# Altium PCB Merilnik_2016_12_20.PcbDoc
Units mm, origin at the board's own origin, x right, y up, seen from the top; angles counter-clockwise.
Board outline 76.75 x 74.18 mm, 2 copper layers (Top Layer, Bottom Layer); 56 components, 46 nets, 217 pads, 29 vias.
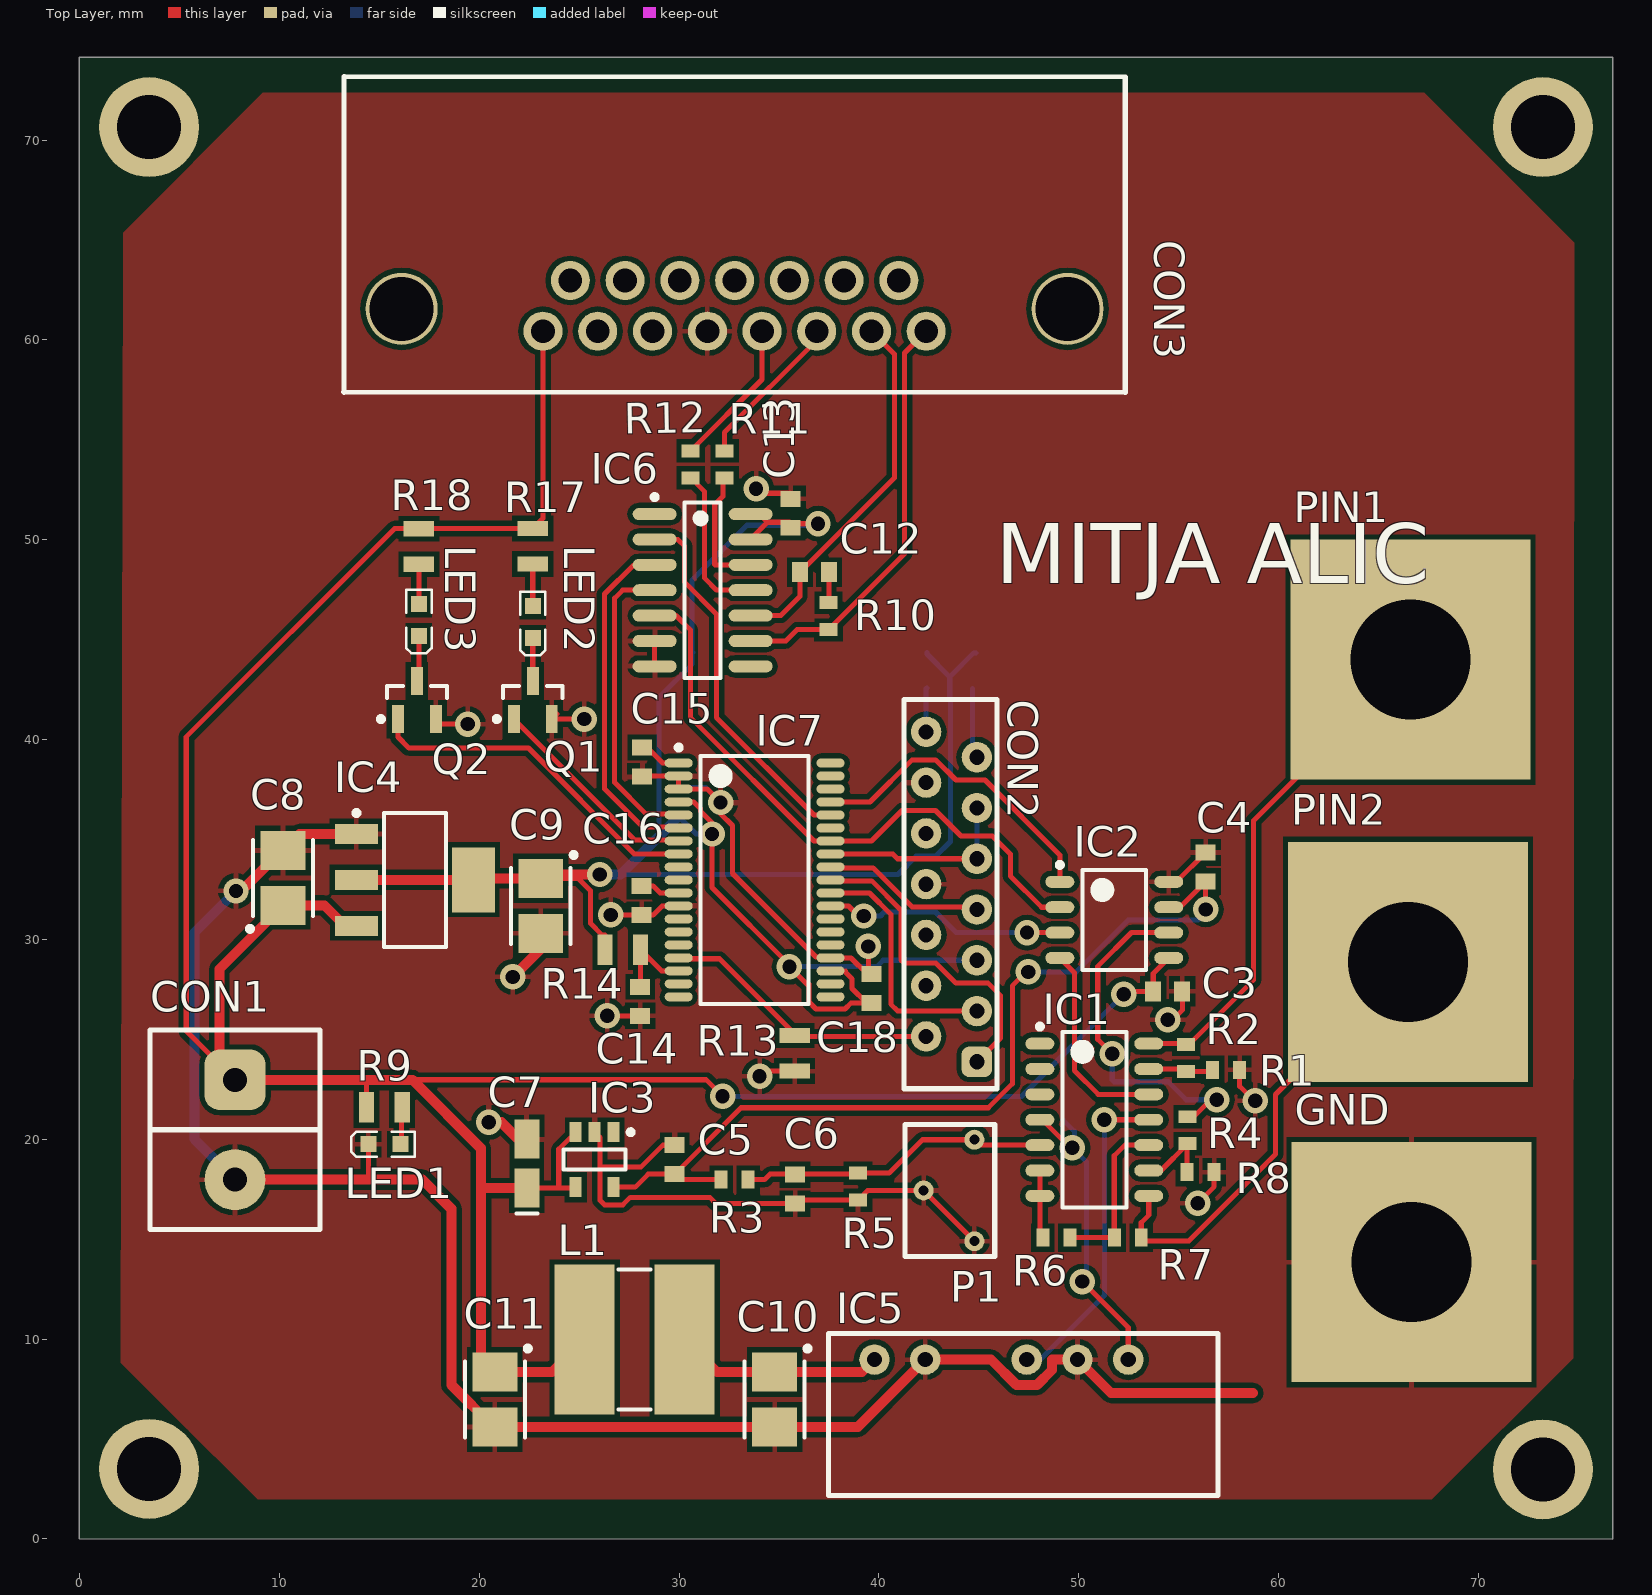
[diagram p0: Top Layer view]
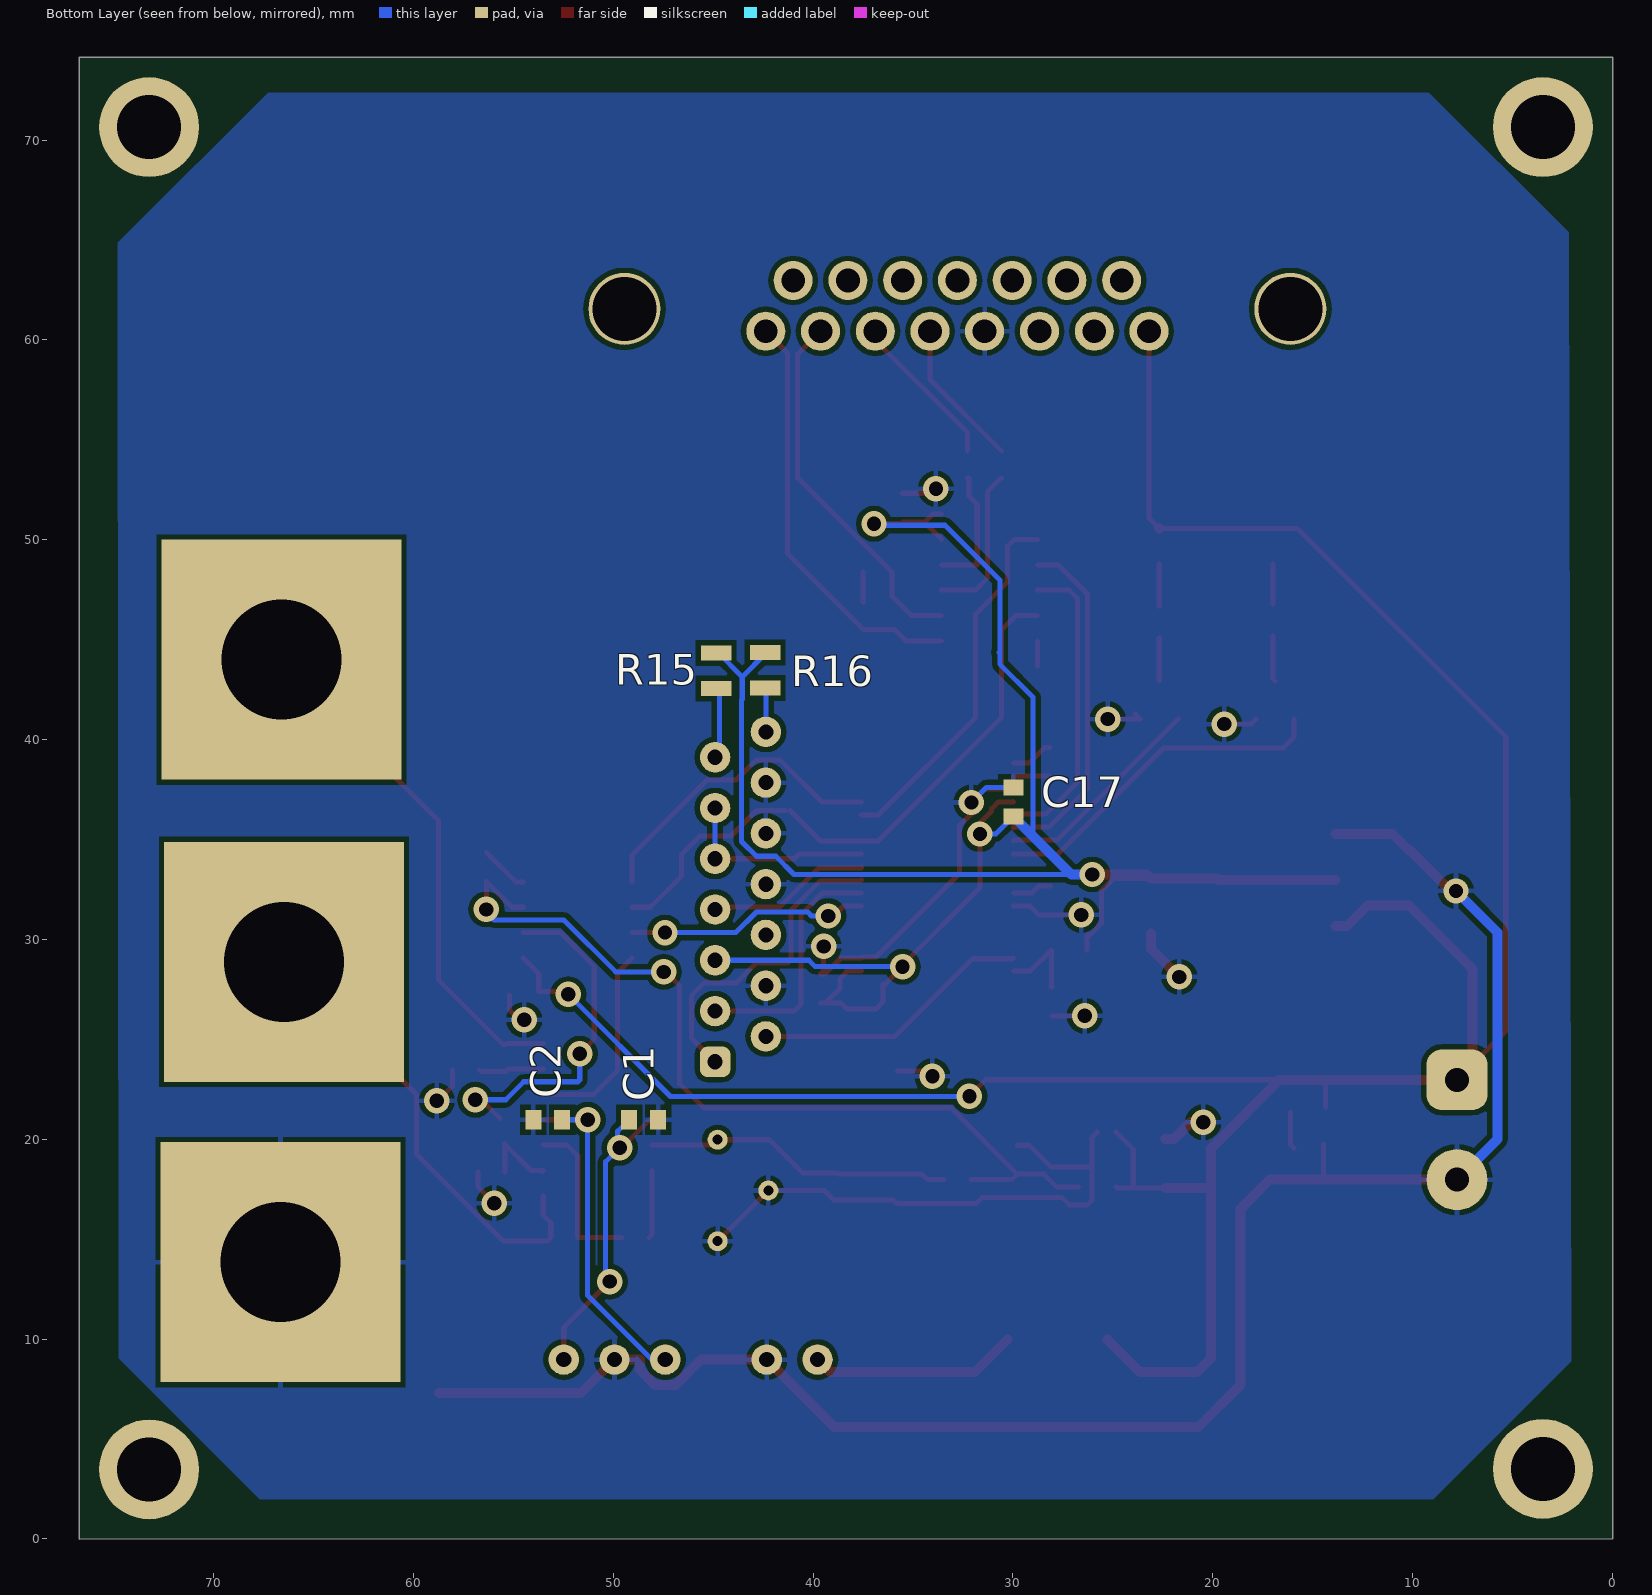
[diagram p1: Bottom Layer view, seen from below]
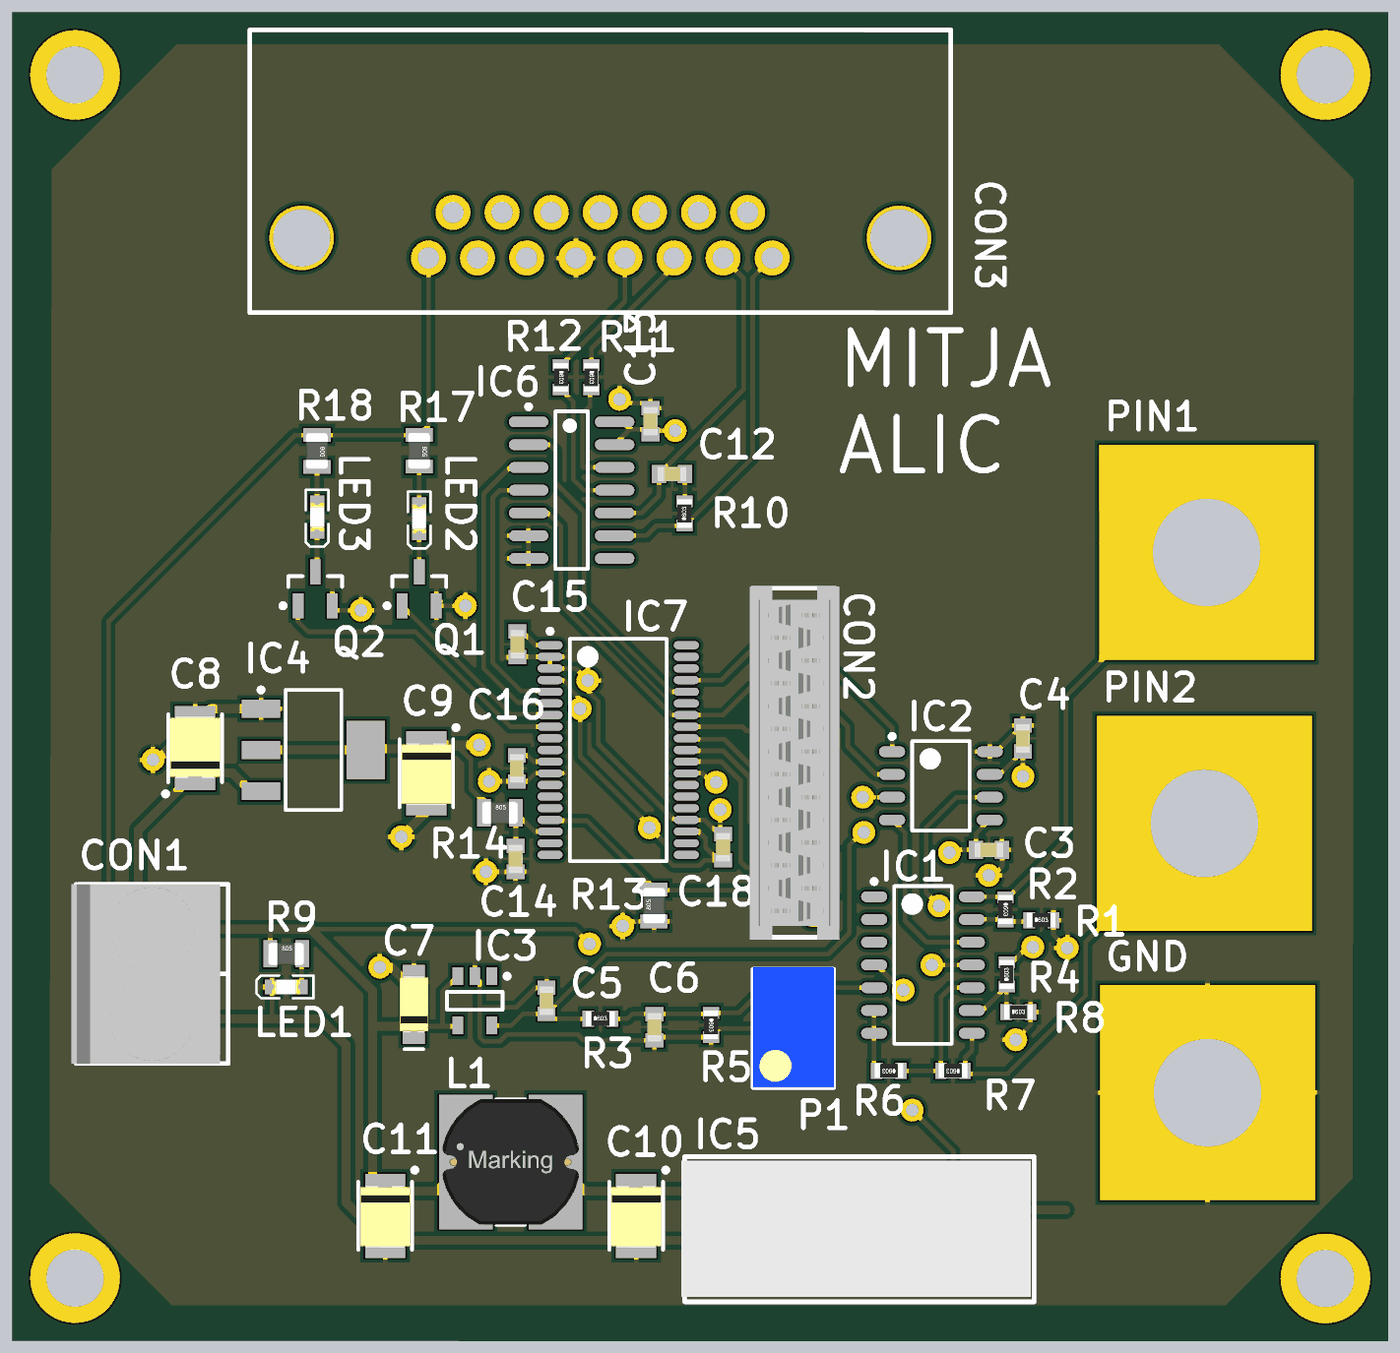
[diagram p2: 3D render of the assembled board from above, using the file's embedded part models]
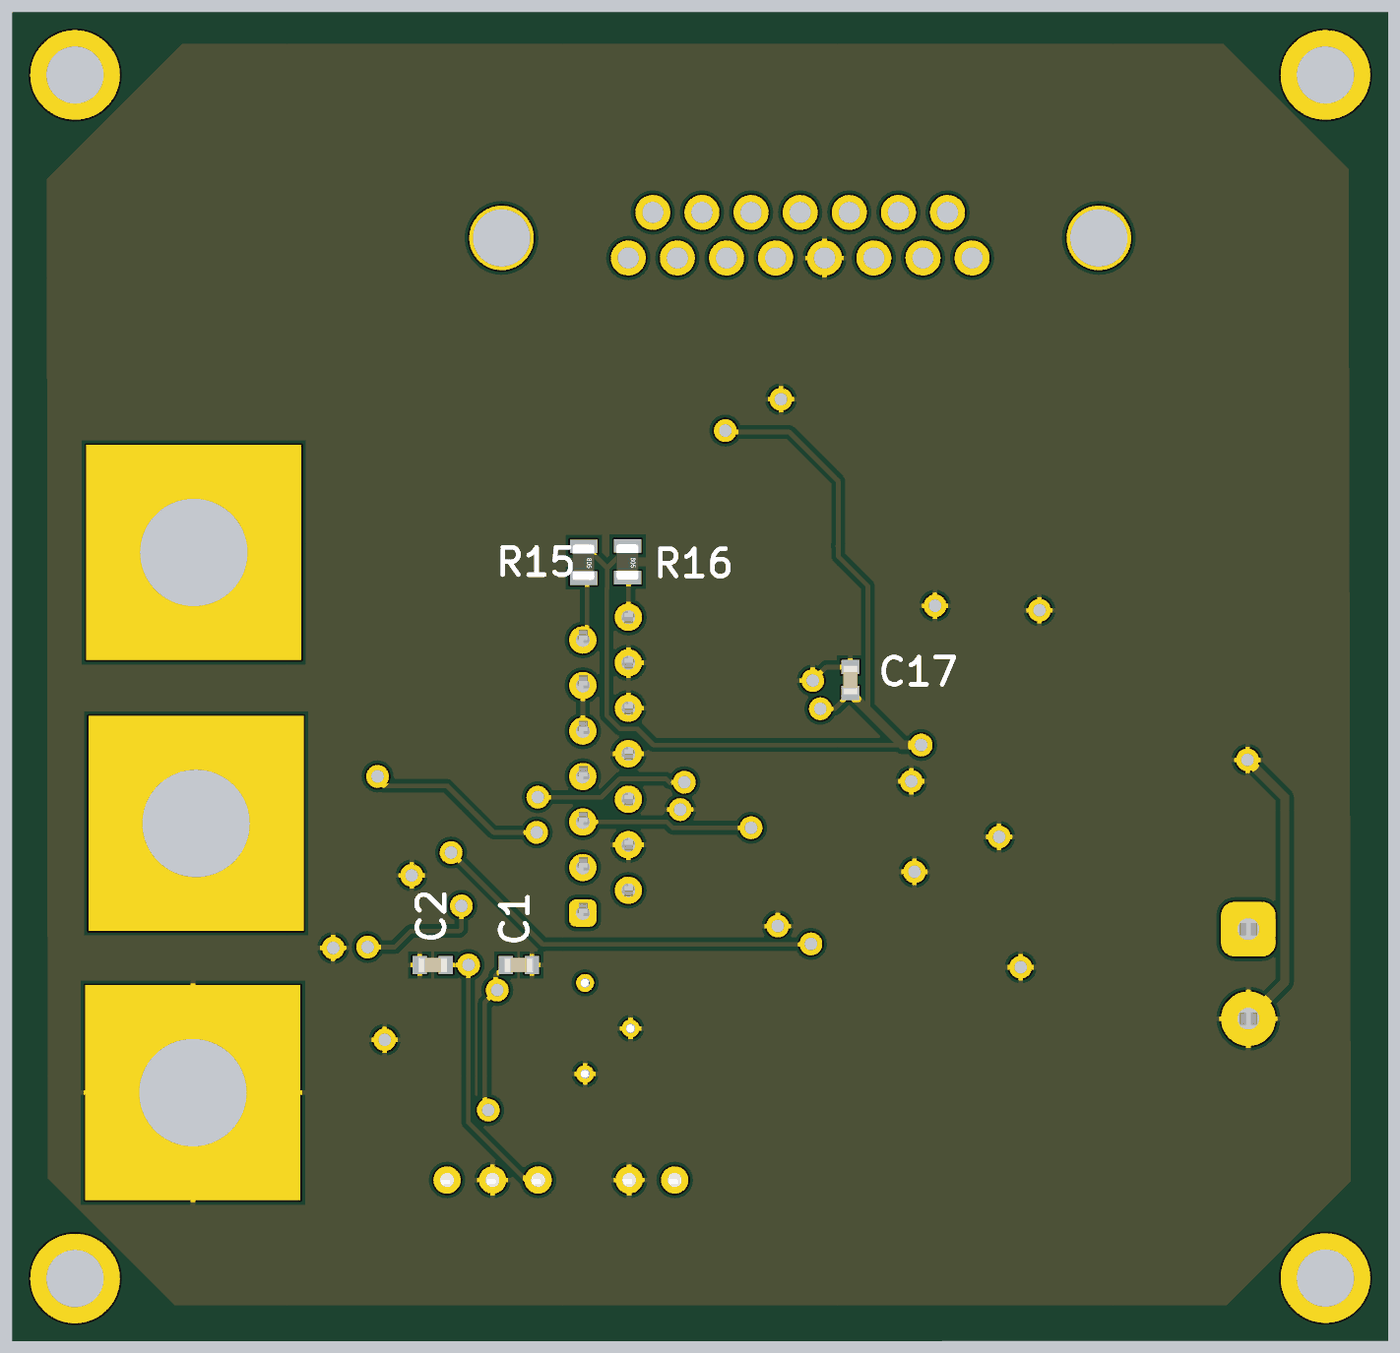
[diagram p3: 3D render of the assembled board from below, using the file's embedded part models]

## Layer stack, top to bottom
Top Solder: solder mask 0.0102, Solder Resist, Dk 3.5
Top Layer: signal copper 0.0356
Dielectric 1: dielectric 0.32, FR-4, Dk 4.8
Bottom Layer: signal copper 0.0356
Bottom Solder: solder mask 0.0102, Solder Resist, Dk 3.5

## Board outline
-0.025,0 76.725,-0.025 76.725,74.15 -0.025,74.15

## Design rules (kind name [scope] priority, off if disabled: settings)
Clearance [All] p1: gap=0.254
PolygonConnect [InNet('GND') vs InNet('GND')] p1: connectstyle=Relief reliefconductorwidth=0.254 reliefentries=4 polygonreliefangle="90 Angle" airgapwidth=0.254
RoutingVias [All] p1: holewidth=0.711 width=1.27 viastyle="Through Hole" minholewidth=0.711 minwidth=1.27 maxholewidth=0.711 maxwidth=1.27
SolderMaskExpansion [All] p1: expansion=0.102
Width [All] p1: maxlimit=0.5 minlimit=0.254 preferedwidth=0.254 minimp=50.000000 maximp=50.000000 favimp=50.000000
30 further rules are at their usual default settings.

## Classes and differential pairs
component class Sheet1: C12 C13 C14 C15 C16 C17 C18 CON2 CON3 IC6 IC7 LED2 LED3 Q1 Q2 R10 R11 R12 R13 R14 R15 R16 R17 R18
component class Designator: C7 C8 C9 C10 C11 CON1 IC3 IC4 IC5 L1 LED1 R9

## Components (designator, comment, footprint, x,y, rotation, side; value= is the part's Value field where it differs from the comment)
C1 "100n" C0603 48.475,20.975 r180 bottom
C2 "100n" C0603 53.275,20.975 r0 bottom
C3 "100n" C0603 54.45,27.4 r0 top
C4 "100n" C0603 56.35,33.625 r90 top
C5 "100n" C0603 29.775,18.975 r90 top
C6 "10p" C0603 35.8,17.5 r270 top
C7 "4u7" "C Tantal A" 22.375,18.775 r90 top
C8 "10u" "C Tantal B" 10.175,33.075 r90 top
C9 "10u" "C Tantal B" 23.075,31.675 r270 top
C10 "2.2u" "C Tantal B" 34.775,6.975 r270 top
C11 "2.2u" "C Tantal B" 20.775,6.975 r270 top
C12 "150p" C0603 36.775,48.375 r180 top
C13 "100n" C0603 35.575,51.325 r90 top
C14 "100n" C0603 28.05,26.9 r270 top
C15 "2u2" C0603 28.15,38.875 r270 top
C16 "2u2" C0603 28.125,31.95 r270 top
C17 "100n" C0603 29.975,36.875 r90 bottom
C18 "2u2" C0603 39.625,27.55 r90 top
CON1 "CON_2pin_5mm" CON_2pin_5mm 7.775,22.975 r270 top
CON2 "JTAG" "JTAG micromatch" 44.9,23.875 r270 top
CON3 "DSUbConector" "DSUB conector" 42.365,60.435 r0 top
GND "PUSA" PUSA 66.65,13.85 r0 top
IC1 "OPA4192IPW onepack" OPA4192 50.775,20.975 r0 top
IC2 "TLV5618ACD" TLV5618ACD 51.775,30.975 r0 top
IC3 "LM4132BMF-4.1" SOT95P280X145-5N 25.775,18.975 r270 top
IC4 "LM1117" SOT230P700X180-4N 16.775,32.975 r0 top
IC5 "TMA 0515D" "TMA 0515D" 39.775,8.975 r270 top
IC6 "SN65HVD73D" D14_N 31.175,47.475 r0 top
IC7 "TMS320F28027_DA_" TSOP65P810X120-38N 33.775,32.975 r0 top
L1 "WE-PD2, 74477530" WE-PD2_7850 27.775,9.975 r0 top
LED1 "150060YS75000" LED_0603_Yellow 15.25,19.75 r180 top
LED2 "150060RS75000" LED_0603_Red 22.675,45.875 r270 top
LED3 "150060VS75000" "LED_0603_Bright Green" 16.975,45.975 r270 top
P1 "200k" Bourns_3266W 44.775,20.735 r270 top
PIN1 "PUSA" PUSA 66.6,44 r0 top
PIN2 "PUSA" PUSA 66.475,28.875 r0 top
Q1 "BSN20,215" NXP-SOT23_N 22.675,41.975 r90 top
Q2 "BSN20,215" NXP-SOT23_N 16.875,41.975 r90 top
R1 "110k" R0603 57.375,23.475 r0 top
R2 "158k" R0603 55.375,24.075 r270 top
R3 "10k" R0603 32.775,17.975 r0 top
R4 "1k" R0603 55.45,20.45 r90 top
R5 "11k" R0603 38.95,17.625 r270 top
R6 "1k" R0603 48.875,15.075 r180 top
R7 "4.87k" R0603 52.45,15.075 r180 top
R8 "4.87k" R0603 56.1,18.35 r0 top
R9 "120" R0805 15.25,21.6 r0 top
R10 "120" R0603 37.475,46.175 r90 top
R11 "10" R0603 32.275,53.775 r270 top
R12 "10" R0603 30.575,53.775 r270 top
R13 "120" R0805 35.775,24.3 r90 top
R14 "120" R0805 27.175,29.475 r0 top
R15 "" R0805 44.85,43.45 r270 bottom
R16 "" R0805 42.4,43.475 r270 bottom
R17 "120" R0805 22.675,49.675 r270 top
R18 "120" R0805 16.975,49.664 r270 top

## Footprints (in the part's own frame and the unit in brackets; to place one, negate y for a bottom-side part, rotate by r counter-clockwise, add the part's x,y. Pads: shape width x height; smd on the part's side, far side on the other; paste and mask are expansions set on the pad)
Bourns_3266W [mm]
  round 1 hole 0.5: 1(0.76,0) 2(3.3,-2.54) 3(5.84,0)
  silkscreen extent 0,-3.48 6.6,1.02, body extent -0.1,-3.47 6.6,1.02, height 8.25
C0603 [mm] "Chip Capacitor, 2-Leads, Body 1,60x0,81mm, IPC Medium Density"
  rect 0.8x1 smd: 1(-0.725,0) 2(0.725,0)
  body extent -0.8,-0.4 0.8,0.4, height 0.81
"C Tantal A" [mm]
  rect 1.95x1.25 smd: 1(-1.225,0) 2(1.225,0)
  silkscreen extent -2.5,-0.53 -2.5,0.53, body extent -1.6,-0.81 1.6,0.79, height 1.63
"C Tantal B" [mm] "Molded Capacitor, 2-Leads, Body 3,5x2,8mm, IPC Medium Density"
  rect 1.95x2.25 smd: 1(-1.375,0) 2(1.375,0)
  silkscreen extent -2.67,-1.5 1.9,1.77, body extent -1.7,-1.4 1.8,1.4, height 1.93
CON_2pin_5mm [mil]
  rrect50% 120x120 hole 47.24: 1(0,0)
  round 120 hole 47.24: 2(196.85,0)
  silkscreen extent -98,-167 295,167, body extent -98,-177 295,150, height 551
D14_N [mm] "SOIC, 14-Leads, Body 8.7x3.9mm, Pitch 1.27mm, IPC Medium Density"
  oval 2.2x0.6 smd: 1(-2.4,3.81) 2(-2.4,2.54) 3(-2.4,1.27) 4(-2.4,0) 5(-2.4,-1.27) 6(-2.4,-2.54) 7(-2.4,-3.81) 8(2.4,-3.81) 9(2.4,-2.54) 10(2.4,-1.27) 11(2.4,0) 12(2.4,1.27) 13(2.4,2.54) 14(2.4,3.81)
  silkscreen extent -2.52,-4.4 0.9,4.78, body extent -2,-4.38 2,4.38, height 1.75
"DSUB conector" [mm]
  round 3.6 hole 3.2: 0(-26.25,1.12) 0(7.07,1.12)
  round 1.952 hole 1.19: 1(0,0) 2(-2.74,0) 3(-5.48,0) 4(-8.22,0) 5(-10.95,0) 6(-13.7,0) 7(-16.44,0) 8(-19.18,0) 9(-1.37,2.54) 10(-4.11,2.54) 11(-6.85,2.54) 12(-9.59,2.54) 13(-12.33,2.54) 14(-15.07,2.54) 15(-17.81,2.54)
  Top Layer circle w0.254: c7.07,1.12 r1.6
  silkscreen extent -29.15,-3.06 9.96,12.74
"JTAG micromatch" [mil]
  rrect50% 60x60 hole 30: 1(0,0)
  round 60 hole 30: 2(-100,0) 3(-200,0) 4(-300,0) 5(-400,0) 6(-500,0) 7(-600,0) 8(-50,-100) 9(-150,-100) 10(-250,-100) 11(-350,-100) 12(-450,-100) 13(-550,-100) 14(-650,-100)
  silkscreen extent -714,-144 53,39, body extent -718,-149 58,48, height 157
"LED_0603_Bright Green" [mm] "Chip LED, 2-Leads, Body 1.6x0.8mm, IPC Medium Density"
  rect 0.8x0.8 smd: 1(-0.8,0) 2(0.8,0)
  silkscreen extent -1.52,-0.64 1.65,0.64, body extent -0.8,-0.4 0.8,0.4, height 0.7
LED_0603_Red [mm] "Chip LED, 2-Leads, Body 1.6x0.8mm, IPC Medium Density"
  rect 0.8x0.8 smd: 1(-0.8,0) 2(0.8,0)
  silkscreen extent -1.52,-0.64 1.65,0.64, body extent -0.8,-0.4 0.8,0.4, height 0.7
LED_0603_Yellow [mm] "Chip LED, 2-Leads, Body 1.6x0.8mm, IPC Medium Density"
  rect 0.8x0.8 smd: 1(-0.8,0) 2(0.8,0)
  silkscreen extent -1.52,-0.64 1.65,0.64, body extent -0.8,-0.4 0.8,0.4, height 0.7
NXP-SOT23_N [mm] "SOT23, 3-Leads, Body 3x1.4mm, Pitch 0.95mm, IPC Medium Density"
  rect 1.4x0.6 smd: 1(-0.95,0.95) 2(-0.95,-0.95) 3(0.95,0)
  silkscreen extent -1.07,-1.5 0.7,1.92, body extent -0.7,-1.5 0.7,1.5, height 1.1
OPA4192 [mm] "SOP, 14-Leads, Body 8.65x3.90mm, Pitch 1.27mm, IPC Medium Density"
  oval 1.45x0.6 smd: 1(-2.725,3.81) 2(-2.725,2.54) 3(-2.725,1.27) 4(-2.725,0) 5(-2.725,-1.27) 6(-2.725,-2.54) 7(-2.725,-3.81) 8(2.725,-3.81) 9(2.725,-2.54) 10(2.725,-1.27) 11(2.725,0) 12(2.725,1.27) 13(2.725,2.54) 14(2.725,3.81)
  silkscreen extent -2.85,-4.4 1.6,4.78, body extent -2,-4.4 2,4.4, height 1.75
PUSA [mm]
  rect 12x12 hole 6: 1(0,0)
R0603 [mm] "Chip Resistor, 2-Leads, Body 1,55x0,85mm, IPC Medium Density"
  rect 0.65x0.9 smd: 1(-0.675,0) 2(0.675,0)
  body extent -0.8,-0.41 0.8,0.41, height 0.45
R0805 [mil]
  rect 30x60 smd: 1(-35,0) 2(35,0)
  body extent -39,-25 39,24, height 31
SOT95P280X145-5N [mm] "SOT23, 5-Leads, Body 2.90x2.80mm, Pitch 0.95mm, IPC Medium Density"
  rect 1x0.6 smd: 1(-1.375,0.95) 2(-1.375,0) 3(-1.375,-0.95) 4(1.375,-0.95) 5(1.375,0.95)
  silkscreen extent -1.5,-1.55 0.5,1.93, body extent -0.88,-1.52 0.87,1.53, height 1.45
SOT230P700X180-4N [mm] "SOT223, 4-Leads, Body 6.50x7.00mm (avg), Pitch 2.30mm, IPC Medium Density"
  rect 2.15x1 smd: 1(-2.925,2.3) 2(-2.925,0) 3(-2.925,-2.3)
  rect 2.15x3.25 smd: 4(2.925,0)
  silkscreen extent -3.05,-3.35 1.55,3.47, body extent -1.85,-3.35 1.85,3.35, height 1.8
TLV5618ACD [mm] "SOIC, 8-Leads, Body 4.90x3.90mm, Pitch 1.27mm, IPC Medium Density"
  oval 1.45x0.6 smd: 1(-2.725,1.905) 2(-2.725,0.635) 3(-2.725,-0.635) 4(-2.725,-1.905) 5(2.725,-1.905) 6(2.725,-0.635) 7(2.725,0.635) 8(2.725,1.905)
  silkscreen extent -2.85,-2.5 1.6,2.88, body extent -2,-2.5 2,2.5, height 1.75
"TMA 0515D" [mil]
  round 60 hole 30: 1(0,0) 2(0,100) 4(0,300) 5(0,400) 6(0,500)
  silkscreen extent -51,-91 268,677, body extent -42,-97 257,670, height 402
TSOP65P810X120-38N [mm] "TSOP, 38-Leads, Body 12.50x6.10mm, Pitch 0.65mm, IPC Medium Density"
  oval 1.4x0.45 smd: 1(-3.8,5.85) 2(-3.8,5.2) 3(-3.8,4.55) 4(-3.8,3.9) 5(-3.8,3.25) 6(-3.8,2.6) 7(-3.8,1.95) 8(-3.8,1.3) 9(-3.8,0.65) 10(-3.8,0) 11(-3.8,-0.65) 12(-3.8,-1.3) 13(-3.8,-1.95) 14(-3.8,-2.6) 15(-3.8,-3.25) 16(-3.8,-3.9) 17(-3.8,-4.55) 18(-3.8,-5.2) 19(-3.8,-5.85) 20(3.8,-5.85) 21(3.8,-5.2) 22(3.8,-4.55) 23(3.8,-3.9) 24(3.8,-3.25) 25(3.8,-2.6) 26(3.8,-1.95) 27(3.8,-1.3) 28(3.8,-0.65) 29(3.8,0) 30(3.8,0.65) 31(3.8,1.3) 32(3.8,1.95) 33(3.8,2.6) 34(3.8,3.25) 35(3.8,3.9) 36(3.8,4.55) 37(3.8,5.2) 38(3.8,5.85)
  silkscreen extent -3.92,-6.2 2.7,6.75, body extent -3.1,-6.2 3.1,6.2, height 1.2
WE-PD2_7850 [mm] "SMD Power Inductor, body 7.8x7.0"
  rect 3x7.5 smd: 1(-2.5,0) 2(2.5,0)
  silkscreen extent -0.8,-3.5 0.8,3.5, body extent -3.81,-3.5 3.81,3.5, height 4.91

## Part data
C1 C2 C3 C4 C5 C6 C12 C13 C14 C15 C16 C17 C18: library part C, "Capacitor"
C7 C8 C9 C10 C11: library part C+, "Capacitor Polarized"
CON1: "Konektor za  Bernic ohišja Serija 605, 5 mm raster"
IC3: "Precision Low Dropout Voltage Reference, 5-pin SOT-23"
IC6: library part SN65HVD55DR, "High Output Full-Duplex RS-485 Driver and Receiver, 1 Mbps, 5 V, -40 to 85 degC, 14-pin SOIC (D), Green (RoHS & no Sb/Br)"
IC7: "Imported"
L1: "WE-PD2 SMD Power Inductor, size 7850, 1000uH"
LED1: library part "WL-SMCW 0603  150060YS75000", "SMD mono-color Chip LED, WL-SMCW, Yellow"
LED2: library part "WL-SMCW 0603  150060RS75000", "SMD mono-color Chip LED, WL-SMCW, Red"
LED3: library part "WL-SMCW 0603  150060VS75000", "SMD mono-color Chip LED, WL-SMCW, Bright Green"
P1: library part POT, "POTENTIOMETER"
Q1 Q2: "N-Channel Enhancement Mode Field-Effect Transistor, 50 V, 0.173 A, 3-Pin SOT23, Tape and Reel"
R1 R2 R3 R4 R5 R6 R7 R8 R9 R10 R11 R12 R13 R14 R15 R16 R17 R18: library part R, "R"

## Free pads (board coordinates)
  round 5 hole 3.2: 0(3.475,3.5) 0(3.475,70.65) 0(73.225,3.475) 0(73.225,70.65)

## Via types
v1: diameter 1.27, hole 0.711, Top Layer to Bottom Layer, 29 vias

## Nets (pads, with @x,y where several pads share a name; then routed paths per layer and width w, separated by ;. In a path a pad name is that pad's centre, name@x,y a point inside that pad or via, vN(x,y) a via of type N, cw(c..) or ccw(c..) an arc to the next point about the centre after c; other vN are vias at no path point)
3.3V: C9.1 C13.1 C17.1 C18.1 CON2.3 IC4.2 IC4.4 IC6.13 IC6.14 IC7.4 IC7.22 R14.1 R15.1 R16.1 | length 109.8
  Top Layer w0.254: C9.1 24.95,33.05 25.559,32.441 25.559,30.804 26.154,30.209 26.286,30.209 R14.1 ; IC7.4@30,36.9 IC7.4 30.725,36.875 31.059,36.541 31.059,36.429 31.65,35.838 v1(31.65,35.275) 31.65,32.6 35.516,28.734 v1(35.516,28.634) 36.394,27.756 36.494,27.756 36.494,26.874 36.849,26.519 38.301,26.519 38.607,26.825 C18.1@39.375,26.825 ; IC6.13 33.575,50.025 34.425,50.875 ; IC6.14 34.015,51.285 34.425,50.875 ; v1(36.95,50.8) 35.6,50.8 35.525,50.875 34.425,50.875 ; IC7.22 38.325,28.425 38.325,28.357 38.656,28.026 38.656,27.544 C18.1@39.375,26.825 ; C18.1 C18.1@39.375,26.825
  Top Layer w0.5: IC4.2 IC4.4 19.775,33.05 C9.1 23.275,33.25 v1(26.025,33.25)
  Bottom Layer w0.254: 27.075,33.25 40.95,33.25 41.862,34.162 42.833,34.162 43.575,34.904 43.575,41.979 43.532,42.022 43.543,42.033 43.543,43.136 ; 29,35.175 29,42.125 30.65,43.775 30.65,44.325 ; C17.1 30.85,35.275 v1(31.65,35.275) ; 30.689,44.364 30.65,44.325 ; v1(35.516,28.634) 39.889,28.634 40.21,28.955 CON2.3 ; v1(36.95,50.8) v1@36.95,51.025 ; R16.1 42.4,44.279 43.543,43.136 ; R15.1 44.746,44.339 43.543,43.136 ; 30.65,44.325 30.65,47.981 33.394,50.725 36.65,50.725 v1@36.95,51.025 ; v1@36.95,51.025 36.95,51.071 36.977,51.098 37,51.075 v1@36.95,51.025
  Bottom Layer w0.5: v1(26.025,33.25) 27.075,33.25 29,35.175 C17.1
5V: C3.1 C7.1 C8.1 C11.1 CON1.1 CON3.8 IC2.5 IC3.3 IC3.4 IC4.3 L1.1 R9.1 R17.1 R18.1 | length 145
  Top Layer w0.254: CON1.1 7,23.75 5.336,25.414 5.336,40.136 15.753,50.553 R18.1 R17.1@22.664,50.553 ; 14.336,22.911 14.361,22.886 ; R9.1 14.361,22.886 ; 14.361,22.975 14.361,22.936 14.361,22.886 ; 16.6,22.975 16.65,22.975 31.35,22.975 v1(32.175,22.15) ; C7.1 23.975,17.55 ; R17.1 23.185,51.074 CON3.8 ; IC3.4 24.775,17.55 23.975,17.55 ; IC3.3 23.975,19.5 23.975,17.55 ; v1(52.25,27.25) 52.4,27.4 C3.1 53.725,28.295 IC2.5
  Top Layer w0.5: CON1.1@7,23.75 7,28.525 C8.1 12.25,31.7 13.275,30.675 IC4.3 ; CON1.1 14.361,22.975 ; 14.361,22.936 14.4,22.975 16.6,22.975 ; 16.65,22.975 20.075,19.55 20.075,17.55 ; C7.1 20.075,17.55 ; R17.1@22.664,50.553 R17.1 ; L1.1 23.65,8.35 C11.1 20.075,9.05 20.075,17.55
  Bottom Layer w0.254: v1(32.175,22.15) 32.191,22.134 47.134,22.134 v1(52.25,27.25) ; v1@52.088,27.413 v1@52.362,27.688
+15: C1.1 IC1.4 IC5.6 | length 16.3
  Top Layer w0.254: IC1.4 48.168,20.975 49.568,19.575 v1(49.675,19.575) ; v1(50.175,12.875) 52.475,10.575 IC5.6
  Bottom Layer w0.254: C1.1 49.775,20.4 49.775,19.575 v1(49.675,19.575) 50.375,18.875 50.375,13.075 50.175,13.275 v1(50.175,12.875)
-15: C2.1 IC1.11 IC5.4 | length 17.5
  Top Layer w0.254: v1(51.275,20.975) IC1.11
  Bottom Layer w0.254: IC5.4 48.075,8.975 51.291,12.191 51.291,20.959 v1(51.275,20.975) C2.1
C+: IC1.10 R6.1 R7.2 | length 8.3
  Top Layer w0.254: R6.1 R7.2 51.775,19.175 52.305,19.705 IC1.10
C\S\: IC2.3 IC7.27 | length 12.4
  Top Layer w0.254: IC7.27 38.475,31.675 39.175,30.975 39.236,31.036 v1(39.236,31.174) ; v1(47.41,30.34) IC2.3
  Bottom Layer w0.254: v1(39.236,31.174) 40.074,31.174 40.268,31.368 42.833,31.368 43.861,30.34 v1(47.41,30.34)
CLK+: CON3.1 IC6.9 R10.1 | length 21.1
  Top Layer w0.254: IC6.9 35.335,44.935 35.9,45.5 R10.1 41.275,49.3 41.275,59.345 CON3.1
CLK-: C12.2 CON3.2 IC6.10 | length 18.6
  Top Layer w0.254: IC6.10 35.087,46.205 36.05,47.168 C12.2 40.767,53.092 40.767,59.293 CON3.2
DAT+: CON3.3 R11.1 | length 7.9
  Top Layer w0.254: R11.1 32.275,55.375 36.885,59.985 CON3.3
DAT-: CON3.4 R12.1 | length 7.5
  Top Layer w0.254: R12.1 34.145,58.02 CON3.4
DE: IC6.4 IC7.5 | length 15.3
  Top Layer w0.254: IC6.4 27.175,47.475 26.774,47.074 26.774,37.851 28.356,36.269 29.931,36.269 IC7.5
GND: C1.2 C2.2 C3.2 C4.2 C5.2 C6.2 C7.2 C8.2 C9.2 C10.2 C11.2 C13.2 C14.2 C15.2 C16.2 C17.2 C18.2 CON1.2 CON2.9 CON2.11 CON2.12 CON2.13 CON3.5 GND.1 IC2.8 IC3.2 IC4.1 IC5.2 IC5.5 IC6.6 IC6.7 IC7.2 IC7.3 IC7.12 IC7.23 LED1.2 P1.2 P1.3 Q1.2 Q2.2 R1.2 R5.2 R8.2 R13.1 | length 167.6
  Top Layer w0.254: 14.25,17.975 14.45,18.175 LED1.2 ; Q2.2 18.075,40.775 v1(19.425,40.775) ; Q1.2@23.875,41.275 Q1.2 v1(25.25,41.025) ; IC3.2 26.044,20.081 26.044,18.575 ; v1(26.4,26.175) C14.2 ; v1(26.575,31.225) C16.2 28.7,31.225 29.15,31.675 IC7.12 ; C15.2 28.175,38.175 IC7.2 IC7.3 31.4,37.525 v1(32.075,36.85) 32.075,36.287 32.666,35.696 32.666,33.302 36.849,29.119 37.531,29.119 IC7.23 38.6,29.075 39.4,28.275 C18.2 39.468,28.432 v1(39.468,29.65) v1@39.525,29.593 ; IC6.7 IC6.6 ; C5.2 29.182,19.7 28.082,18.6 26.069,18.6 26.044,18.575 ; v1(33.85,52.55) 34.075,52.325 C13.2@35.525,52.325 ; v1(34.028,23.15) 34.289,23.411 R13.1 ; P1.3 P1.2 39.435,17.435 R5.2 35.975,16.95 C6.2 31.85,16.775 31.533,17.092 27.556,17.092 27.183,16.719 26.267,16.719 26.044,16.942 26.044,18.575 ; v1(54.45,25.975) 54.625,25.975 54.652,26.001 54.689,25.964 55.2,26.475 C3.2@55.2,27.225 ; IC2.8 54.88,32.88 C4.2 ; v1(55.95,16.8) 56.775,17.625 R8.2 ; R1.2 58.05,22.65 58.775,21.925 v1(58.825,21.925)
  Top Layer w0.5: CON1.2 14.25,17.975 17.15,17.975 18.6,16.525 18.6,7.712 20.712,5.6 C11.2 C10.2 38.94,5.6 IC5.2 45.605,8.975 46.871,7.709 47.919,7.709 48.661,8.451 48.661,8.975 IC5.5 51.61,7.3 58.725,7.3 ; v1(7.825,32.425) 7.825,32.163 10.112,34.45 C8.2 11,35.275 IC4.1 ; v1(20.475,20.85) 21.1,20.85 21.95,20 C7.2 ; v1(21.675,28.125) 23.075,29.525 C9.2 ; CON3.5@31.16,60.435 CON3.5
  Bottom Layer w0.254: C17.2 31.325,37.6 v1(32.075,36.85) ; v1@58.428,21.597 58.756,21.925 v1(58.825,21.925)
  Bottom Layer w0.5: CON1.2 5.747,20.003 5.747,30.347 v1(7.825,32.425)
HITROST: IC2.6 R4.2 | length 17.5
  Top Layer w0.254: v1(51.675,24.275) 50.95,25 50.95,28.65 52.64,30.34 IC2.6 ; R4.2@55.675,21.05 56.6,21.975 v1(56.9,21.975)
  Bottom Layer w0.254: v1(51.675,24.275) 51.675,22.975 51.775,22.875 54.475,22.875 55.375,21.975 v1(56.9,21.975)
HITROST-10V10V: IC1.8 PIN2.1 R7.1 | length 23.5
  Top Layer w0.254: IC1.8 53.5,16.2 53.125,15.825 R7.1 53.291,14.909 55.509,14.909 55.509,14.922 59.841,19.254 59.841,22.241 PIN2.1 ; PIN2.1@68.075,27.475 PIN2.1@68.075,27.75
KOT10X: IC1.12 IC2.4 | length 10.2
  Top Layer w0.254: IC2.4 49.775,28.345 49.775,23.438 50.968,22.245 IC1.12
"KOT10X 010V": IC1.14 PIN1.1 R2.1 | length 25.9
  Top Layer w0.254: IC1.14 55.34,24.785 R2.1 55.525,24.75 58.75,27.975 58.75,35.95 66.6,43.8 PIN1.1
LED_HIT: IC7.7 Q1.1 | length 10.8
  Top Layer w0.254: Q1.1 27.781,34.969 29.931,34.969 IC7.7
LED_POZ: IC7.8 Q2.1 | length 17.4
  Top Layer w0.254: Q2.1 15.925,40.125 16.475,39.575 22.457,39.575 27.757,34.275 IC7.8
NetC6_1: C6.1 IC1.5 P1.1 R3.2 R5.1 | length 15.5
  Top Layer w0.254: R3.2 34.275,17.975 34.55,18.25 38.725,18.25 38.775,18.3 R5.1 40.5,18.3 42.175,19.975 P1.1 45.045,19.705 IC1.5
NetC10_1: C10.1 IC5.1 L1.2 | length 10.4
  Top Layer w0.5: L1.2 31.9,8.35 C10.1 39.15,8.35 IC5.1
NetC12_1: C12.1 R10.2 | length 1.5
  Top Layer w0.254: R10.2 37.5,46.875 C12.1
NetC14_1: C14.1 IC7.17 R14.2 | length 4.3
  Top Layer w0.254: C14.1@28.1,27.625 C14.1 28.064,27.639 R14.2 29.114,28.425 IC7.17
NetC15_1: C15.1 IC7.1 | length 2.1
  Top Layer w0.254: C15.1 28.4,39.6 29.175,38.825 IC7.1
NetC16_1: C16.1 IC7.11 | length 2
  Top Layer w0.254: C16.1 28.7,32.675 29.05,32.325 IC7.11
NetCON2_1: CON2.1 IC7.29 | length 16.2
  Top Layer w0.254: IC7.29 37.619,32.931 39.634,32.931 41.1,31.465 41.1,28.975 41.247,28.828 42.833,28.828 43.849,27.812 45.463,27.812 46.092,27.183 46.092,25.067 CON2.1
NetCON2_2: CON2.2 IC7.28 | length 12.4
  Top Layer w0.254: IC7.28 39.522,32.325 40.592,31.255 40.592,26.758 40.935,26.415 CON2.2
NetCON2_4: CON2.4 IC7.30 | length 8.2
  Top Layer w0.254: IC7.30 37.575,33.581 39.703,33.581 41.662,31.622 44.773,31.622 CON2.4
NetCON2_5: CON2.5 CON2.6 IC7.31 | length 10
  Top Layer w0.254: IC7.31 40.467,34.275 40.692,34.275 40.932,34.035 CON2.5
  Bottom Layer w0.254: CON2.5 CON2.6
NetCON2_7: CON2.7 R15.2 | length 3.5
  Bottom Layer w0.254: R15.2@44.675,42.561 44.675,39.34 CON2.7
NetCON2_14: CON2.14 R16.2 | length 2.2
  Bottom Layer w0.254: CON2.14 42.36,42.546 R16.2
NetIC1_6: IC1.6 IC1.7 R6.2 | length 3.4
  Top Layer w0.254: IC1.6 IC1.7 48.05,15.225 R6.2
NetIC1_9: IC1.9 R4.1 R8.1 | length 4
  Top Layer w0.254: IC1.9@53.56,18.375 IC1.9 54.11,18.435 R4.1@55.425,19.75 ; R8.1 R4.1@55.425,19.75 ; R4.1 R4.1@55.425,19.75
NetIC1_13: IC1.13 R1.1 R2.2 | length 3.3
  Top Layer w0.254: IC1.13 55.26,23.515 R2.2 56.625,23.4 R1.1
NetIC6_11: IC6.11 R12.2 | length 7.9
  Top Layer w0.254: R12.2 31.275,52.4 31.275,48.075 31.875,47.475 IC6.11
NetIC6_12: IC6.12 R11.2 | length 6.4
  Top Layer w0.254: R11.2 32.2,53.1 32.2,52.175 31.783,51.758 31.783,48.767 31.805,48.745 IC6.12
NetLED1_1: LED1.1 R9.2 | length 1.9
  Top Layer w0.254: LED1.1@15.925,19.55 16.114,19.739 R9.2@16.114,21.35
NetLED2_1: LED2.1 R17.2 | length 2.1
  Top Layer w0.254: LED2.1 R17.2
NetLED2_2: LED2.2 Q1.3 | length 2.2
  Top Layer w0.254: Q1.3 LED2.2
NetLED3_1: LED3.1 R18.2 | length 2
  Top Layer w0.254: LED3.1 R18.2
NetLED3_2: LED3.2 Q2.3 | length 2.3
  Top Layer w0.254: Q2.3 16.975,43.025 LED3.2
RE: IC6.3 IC7.6 | length 17.4
  Top Layer w0.254: IC6.3 27.745,48.745 26.983,47.983 26.965,47.983 26.266,47.284 26.266,37.534 28.181,35.619 29.931,35.619 IC7.6
SDI: IC2.1 IC7.35 | length 15.7
  Top Layer w0.254: IC7.35 39.549,36.875 41.662,38.988 42.833,38.988 43.849,37.972 45.303,37.972 49.05,34.225 IC2.1
SPICLK: IC2.2 IC6.5 IC7.32 | length 30.6
  Top Layer w0.254: IC6.5 29.845,46.205 30.575,45.475 30.575,41.098 36.748,34.925 IC7.32 39.625,34.925 41.148,36.448 ; 41.373,36.448 42.833,36.448 44.106,35.175 44.424,35.175 44.427,35.178 45.672,35.178 46.575,34.275 46.575,33.175 48.14,31.61 IC2.2
SPIMISO: IC6.2 IC7.34 | length 18.6
  Top Layer w0.254: IC6.2 29.935,50.015 30.275,49.675 30.275,47.875 31.875,46.275 31.875,41.098 36.748,36.225 IC7.34
TRST: CON2.8 IC7.16 R13.2 | length 14
  Top Layer w0.254: IC7.16 30.019,29.031 32.019,29.031 35.905,25.145 CON2.8
VREF: C4.1 C5.1 IC2.7 IC3.5 R3.1 | length 44.7
  Top Layer w0.254: IC3.5 27.8,17.6 28.45,18.25 C5.1 ; R3.1 30.05,17.975 C5.1 ; v1(47.475,28.375) 47.375,28.375 46.675,27.675 46.675,22.775 45.475,21.575 33.1,21.575 C5.1 ; IC2.7 55.06,31.61 C4.1 v1(56.35,31.5) v1@56.24,31.61
  Bottom Layer w0.254: v1(47.475,28.375) 49.875,28.375 52.475,30.975 55.975,30.975 56.35,31.35 v1(56.35,31.5)
pads on no net: CON2.10 CON3.0 CON3.6 CON3.7 CON3.9 CON3.10 CON3.11 CON3.12 CON3.13 CON3.14 CON3.15 IC1.1 IC1.2 IC1.3 IC3.1 IC6.1 IC6.8 IC7.9 IC7.10 IC7.13 IC7.14 IC7.15 IC7.18 IC7.19 IC7.20 IC7.21 IC7.24 IC7.25 IC7.26 IC7.33 IC7.36 IC7.37 IC7.38

## Polygon pours and split planes (outlines as drawn)
GND on Bottom Layer "Top Layer-No Net" (solid, pour order 4): 67.676,1.976 8.974,1.976 8.149,2.801 2.058,8.892 2.182,65.382 9.176,72.376 67.274,72.376 74.349,65.301 74.799,64.851 74.75,9.05
GND on Top Layer "Top Layer-No Net" (solid, pour order 0): 67.675,1.975 8.9,1.975 8.075,2.8 2.051,8.824 2.175,65.375 9.175,72.375 67.275,72.375 74.8,64.85 74.75,9.05

## Silkscreen, mask and mechanical layers (free items; w line width, h text height)
Top Overlay:
  text "MITJA ALIC" at 45.85,47.825 h3